# Altium PCB wsg1.0.PcbDoc (part 3 of 3)
Units mm, origin at the board's own origin, x right, y up, seen from the top; angles counter-clockwise.
Board outline 55.37 x 28.61 mm, 4 copper layers (F.Cu, In1.Cu, In2.Cu, B.Cu); 38 components, 55 nets, 181 pads, 63 vias.
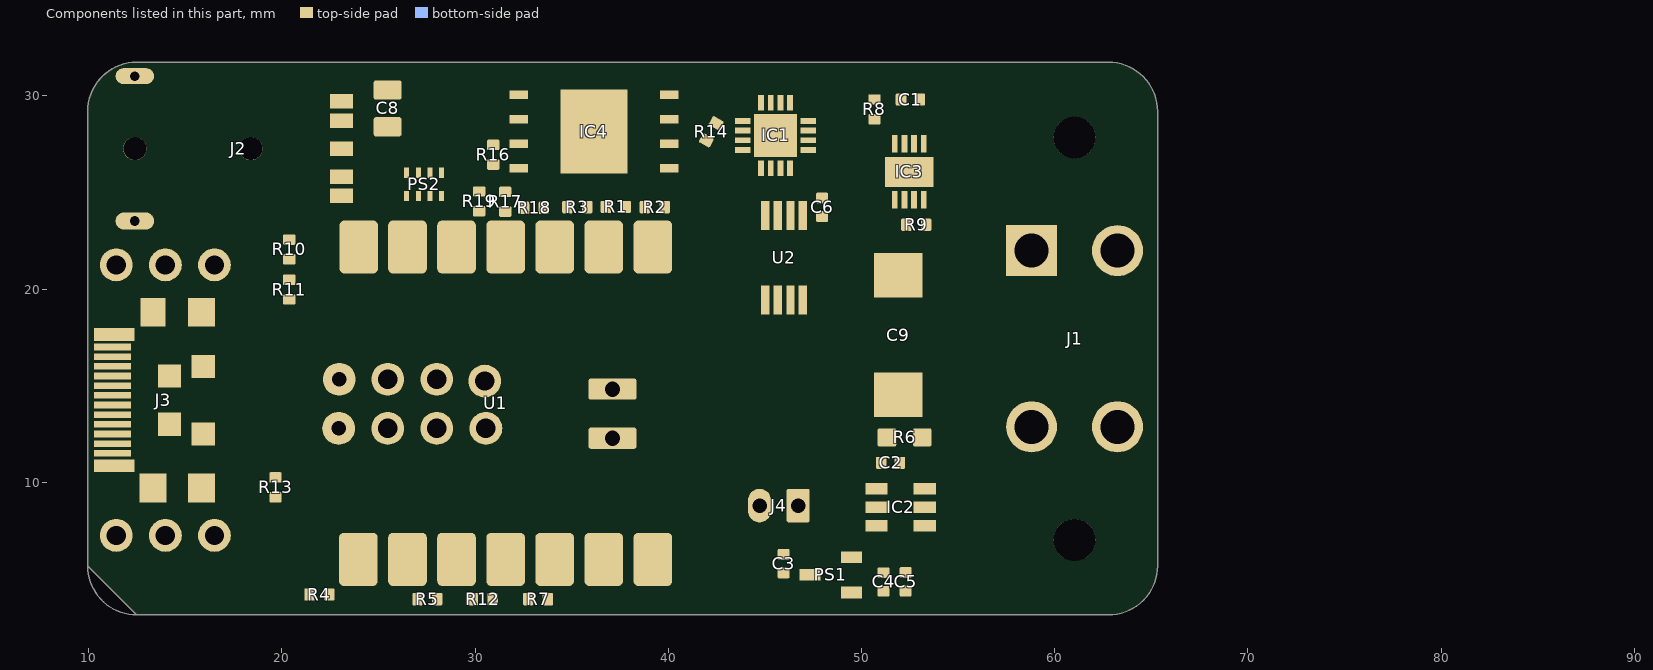
[diagram p5: the components of this part, seen from the top]

## Polygon pours and split planes (outlines as drawn) (continued)
GNDA on F.Cu "F.Cu-GNDA-19" (solid, remove dead copper, pour order 30255): 50.445,26.196 50.445,25.942 51.22,25.294 52.471,26.069 51.22,26.844
Net-(PS2-FB) on F.Cu "F.Cu-Net-(PS2-FB)-3" (solid, remove dead copper, pour order 30341): 21.234,21.603 21.234,21.476 21.881,21.632 21.751,21.949 21.433,22.08
GNDA on F.Cu "F.Cu-GNDA-18" (solid, remove dead copper, pour order 30271): 26.064,20.895 25.556,20.895 25.467,20.209 25.81,20.208 26.153,20.209
CS-MEM on F.Cu "F.Cu-CS-MEM-4" (solid, remove dead copper, pour order 30389): 29.35,4.013 29.35,3.886 29.653,3.679 29.891,3.949 29.653,4.219
"DAC Bias" on F.Cu "F.Cu-DAC Bias" (solid, remove dead copper, pour order 30326): 52.627,28.053 52.754,28.053 53.007,28.608 52.69,28.74 52.373,28.608
5V5 on F.Cu "F.Cu-5V5-10" (solid, remove dead copper, pour order 30272): 49.856,10.445 49.856,10.953 49.17,11.042 49.169,10.699 49.17,10.356
CS-MEM on F.Cu "F.Cu-CS-MEM-3" (solid, remove dead copper, pour order 30392): 32.837,29.913 33.016,30.092 32.725,30.245 32.249,30.06 32.725,29.834
GNDA on F.Cu "F.Cu-GNDA-17" (solid, remove dead copper, pour order 30321): 47.833,25.047 48.087,25.047 48.461,25.262 48.33,25.58 48.013,25.71
CS-MEM on F.Cu "F.Cu-CS-MEM-2" (solid, remove dead copper, pour order 30337): 29.488,3.886 29.488,4.013 28.951,4.356 28.819,4.039 28.951,3.722
GNDA on F.Cu "F.Cu-GNDA-16" (solid, remove dead copper, pour order 30249): 25.556,20.209 26.064,20.209 27.083,20.816 26.5,22.175 25.5,21.299
5V5 on F.Cu "F.Cu-5V5-9" (solid, remove dead copper, pour order 30300): 45.673,30.163 45.927,30.163 46.117,30.718 45.8,30.85 45.483,30.718
MISO on F.Cu "F.Cu-MISO" (solid, remove dead copper, pour order 30334): 33.928,25.141 34.018,25.231 33.807,25.804 33.489,25.673 33.359,25.356
"5V Reference" on F.Cu "F.Cu-5V Reference-2" (solid, remove dead copper, pour order 30348): 48.55,23.622 48.55,23.876 48.184,24.018 47.959,23.749 48.184,23.48
GNDA on F.Cu "F.Cu-GNDA-15" (solid, remove dead copper, pour order 30207): 26.83,26.359 27.88,26.379 27.91,24.379 27.47,22.839 26.85,23.559
"5V Reference" on F.Cu "F.Cu-5V Reference-1" (solid, remove dead copper, pour order 30267): 51.571,13.269 51.063,13.269 50.848,12.648 51.317,12.318 51.787,12.648
Net-(J3-CC) on F.Cu "F.Cu-Net-(J3-CC)" (solid, remove dead copper, pour order 30365): 19.797,10.789 19.543,10.789 19.4,10.487 19.67,10.248 19.94,10.487
MISO_ADC on F.Cu "F.Cu-MISO_ADC" (solid, remove dead copper, pour order 30359): 43.066,28.636 43.066,28.763 42.522,28.866 42.474,28.581 42.713,28.353
5V5 on F.Cu "F.Cu-5V5-8" (solid, remove dead copper, pour order 30277): 49.916,7.335 49.916,7.843 49.23,7.932 49.229,7.589 49.23,7.246
CS-DAC on F.Cu "F.Cu-CS-DAC-2" (solid, remove dead copper, pour order 30335): 46.384,22.983 46.257,22.983 46.013,22.43 46.33,22.298 46.647,22.43
5V5 on F.Cu "F.Cu-5V5-7" (solid, remove dead copper, pour order 30308): 51.45,27.392 51.45,27.646 50.901,27.806 50.769,27.489 50.901,27.172
GNDA on F.Cu "F.Cu-GNDA-14" (solid, remove dead copper, pour order 30319): 47.738,27.826 47.738,27.572 48.078,27.207 48.321,27.449 48.32,27.792
CS-DAC on F.Cu "F.Cu-CS-DAC-1" (solid, remove dead copper, pour order 30377): 21.494,4.779 21.367,4.779 21.17,4.426 21.43,4.188 21.69,4.426
CS-MEM on F.Cu "F.Cu-CS-MEM-1" (solid, remove dead copper, pour order 30382): 28.58,3.976 28.58,4.103 28.232,4.255 28.039,3.949 28.301,3.719
MOSI_ADC on F.Cu "F.Cu-MOSI_ADC" (solid, remove dead copper, pour order 30420): 43.262,28.228 43.352,28.138 43.45,28.049 43.851,28.2 43.45,28.337
5V5 on F.Cu "F.Cu-5V5-6" (solid, remove dead copper, pour order 30425): 51.42,27.646 51.42,27.392 51.57,27.369 51.721,27.519 51.57,27.669
GNDA on F.Cu "F.Cu-GNDA-13" (solid, remove dead copper, pour order 30411): 46.173,25.699 46.427,25.699 46.45,25.849 46.3,26.25 46.15,25.849
GNDA on F.Cu "F.Cu-GNDA-12" (solid, remove dead copper, pour order 30274): 27.504,20.895 26.996,20.895 26.907,20.209 27.25,20.208 27.593,20.209
BAT+ on F.Cu "F.Cu-BAT+" (solid, remove dead copper, pour order 30262): 38.666,14.484 39.025,14.843 38.298,15.266 37.111,14.823 38.192,14.294
Net-(IC2-OUT) on F.Cu "F.Cu-Net-(IC2-OUT)-1" (solid, remove dead copper, pour order 30288): 54.268,7.715 53.909,8.075 53.249,8.059 53.269,7.758 53.845,7.55
Net-(PS2-FB) on F.Cu "F.Cu-Net-(PS2-FB)-2" (solid, remove dead copper, pour order 30371): 20.97,21.476 20.97,21.603 20.617,21.799 20.379,21.539 20.617,21.279
SCLK_DAC on F.Cu "F.Cu-SCLK_DAC" (solid, remove dead copper, pour order 30360): 45.552,22.909 45.642,22.819 45.826,23.054 45.661,23.804 45.444,23.054
GNDA on F.Cu "F.Cu-GNDA-11" (solid, remove dead copper, pour order 30301): 45.927,25.755 45.673,25.755 45.483,25.2 45.8,25.068 46.117,25.2
Net-(U1-PA4_A1_D1) on F.Cu "F.Cu-Net-(U1-PA4_A1_D1)" (solid, remove dead copper, pour order 30254): 26.956,3.949 27.083,3.949 27.462,4.943 26.5,6.01 25.809,4.672
GNDA on F.Cu "F.Cu-GNDA-10" (solid, remove dead copper, pour order 30309): 53.622,27.646 53.622,27.392 54.169,27.242 54.301,27.559 54.169,27.876
AmplifiedSig on F.Cu "F.Cu-AmplifiedSig" (solid, remove dead copper, pour order 30353): 51.26,28.662 51.26,28.916 50.907,29.049 50.669,28.789 50.907,28.529
3V3 on F.Cu "F.Cu-3V3-4" (solid, remove dead copper, pour order 30303): 42.438,29.654 42.259,29.834 41.732,29.576 41.863,29.258 42.18,29.128
S- on F.Cu "F.Cu-S-" (solid, remove dead copper, pour order 30401): 51.463,24.019 51.717,24.019 51.776,24.169 51.72,24.62 51.57,24.636
Net-(PS2-FB) on F.Cu "F.Cu-Net-(PS2-FB)-1" (solid, remove dead copper, pour order 30388): 20.443,21.019 20.316,21.019 20.11,20.717 20.38,20.478 20.65,20.717
GNDA on F.Cu "F.Cu-GNDA-9" (solid, remove dead copper, pour order 30369): 45.38,6.333 45.38,6.206 45.746,6 45.971,6.269 45.746,6.538
Net-(IC3-RG_2) on F.Cu "F.Cu-Net-(IC3-RG_2)" (solid, remove dead copper, pour order 30342): 53.016,23.895 52.836,23.716 53.07,23.228 53.341,23.328 53.42,23.649
Net-(IC2-OUT) on F.Cu "F.Cu-Net-(IC2-OUT)" (solid, remove dead copper, pour order 30265): 53.709,11.393 54.068,11.752 53.63,12.503 53.142,12.32 52.946,11.844
3V3 on F.Cu "F.Cu-3V3-3" (solid, remove dead copper, pour order 30223): 29.396,19.821 29.904,19.821 30.04,21.299 29.04,22.175 28.354,20.836
"5V USB" on F.Cu "F.Cu-5V USB" (solid, remove dead copper, pour order 30391): 23.573,29.592 23.573,29.846 23.187,29.954 23.089,29.719 23.187,29.484
USB_D- on F.Cu "F.Cu-USB_D-" (solid, remove dead copper, pour order 30282): 22.115,24.895 22.115,24.743 22.49,24.444 23.091,24.819 22.49,25.194
5V5 on F.Cu "F.Cu-5V5-5" (solid, remove dead copper, pour order 30268): 49.895,7.843 49.895,7.335 50.8,7.459 50.771,7.759 50.195,7.953
CS-MEM on F.Cu "F.Cu-CS-MEM" (solid, remove dead copper, pour order 30327): 28.134,4.103 28.134,3.976 28.689,3.722 28.821,4.039 28.689,4.356
"5V Reference" on F.Cu "F.Cu-5V Reference" (solid, remove dead copper, pour order 30381): 48.921,28.278 48.741,28.099 48.955,27.732 49.191,27.828 49.287,28.064
Net-(PS2-FB) on F.Cu "F.Cu-Net-(PS2-FB)" (solid, remove dead copper, pour order 30324): 26.196,24.536 26.196,24.663 25.641,24.916 25.509,24.599 25.641,24.282
3V3 on F.Cu "F.Cu-3V3-2" (solid, remove dead copper, pour order 30399): 39.576,29.765 39.756,29.585 40.143,29.834 40.051,30.06 39.575,29.834
SCLK_FLASH on F.Cu "F.Cu-SCLK_FLASH" (solid, remove dead copper, pour order 30370): 34.844,24.829 34.717,24.829 34.52,24.476 34.78,24.238 35.04,24.476
CS-ADC on F.Cu "F.Cu-CS-ADC" (solid, remove dead copper, pour order 30427): 43.967,26.912 44.094,26.912 44.121,27.049 43.85,27.2 43.767,27.049
SCLK_ADC on F.Cu "F.Cu-SCLK_ADC" (solid, remove dead copper, pour order 30393): 36.886,24.765 36.796,24.855 36.54,24.53 36.769,24.248 37.03,24.486
GNDA on F.Cu "F.Cu-GNDA-8" (solid, remove dead copper, pour order 30426): 53.52,27.392 53.52,27.646 53.37,27.669 53.219,27.519 53.37,27.369
SCLK on F.Cu "F.Cu-SCLK-3" (solid, remove dead copper, pour order 30221): 38.391,23.816 38.301,23.905 36.621,23.549 36.659,22.173 37.66,21.76
GNDA on F.Cu "F.Cu-GNDA-7" (solid, remove dead copper, pour order 30364): 19.543,8.689 19.797,8.689 19.94,8.992 19.67,9.23 19.4,8.992
MOSI on F.Cu "F.Cu-MOSI" (solid, remove dead copper, pour order 30231): 30.274,23.992 30.147,23.992 30.58,21.839 31.58,22.173 31.795,23.549
"ADC DReady" on F.Cu "F.Cu-ADC DReady-1" (solid, remove dead copper, pour order 30338): 28.977,8.65 29.104,8.65 29.621,8.832 29.49,9.15 29.173,9.28
GNDA on F.Cu "F.Cu-GNDA-6" (solid, remove dead copper, pour order 30295): 52.552,9.405 52.552,9.913 52.357,10.21 52.039,10.079 51.909,9.762
SCLK on F.Cu "F.Cu-SCLK-2" (solid, remove dead copper, pour order 30376): 35.736,23.649 35.863,23.649 36.06,24.002 35.8,24.24 35.54,24.002
CS-DAC on F.Cu "F.Cu-CS-DAC" (solid, remove dead copper, pour order 30344): 46.257,22.838 46.384,22.838 46.536,23.054 46.32,23.805 46.104,23.054
5V5 on F.Cu "F.Cu-5V5-4" (solid, remove dead copper, pour order 30264): 26.006,27.525 26.514,27.525 26.195,28.343 25.47,28.4 25.249,27.899
3V3 on F.Cu "F.Cu-3V3-1" (solid, remove dead copper, pour order 30417): 45.427,30.199 45.173,30.199 45.15,30.049 45.3,29.648 45.45,30.049
5V5 on F.Cu "F.Cu-5V5-3" (solid, remove dead copper, pour order 30345): 50.794,10.374 50.435,10.015 50.371,9.959 50.771,9.658 50.996,9.959
SCLK on F.Cu "F.Cu-SCLK-1" (solid, remove dead copper, pour order 30375): 37.727,23.659 37.854,23.659 38.05,24.012 37.79,24.25 37.53,24.012
GNDA on F.Cu "F.Cu-GNDA-5" (solid, remove dead copper, pour order 30278): 26.794,19.825 26.286,19.825 26.197,19.139 26.54,19.138 26.883,19.139
GNDA on F.Cu "F.Cu-GNDA-4" (solid, remove dead copper, pour order 30318): 45.427,25.751 45.173,25.751 44.808,25.412 45.05,25.168 45.393,25.169
GNDA on F.Cu "F.Cu-GNDA-3" (solid, remove dead copper, pour order 30416): 47.8,27.572 47.8,27.826 47.65,27.849 47.249,27.699 47.65,27.549
3V3 on F.Cu "F.Cu-3V3" (solid, remove dead copper, pour order 30279): 29.904,19.745 29.396,19.745 29.307,19.059 29.65,19.058 29.993,19.059
"ADC DReady" on F.Cu "F.Cu-ADC DReady" (solid, remove dead copper, pour order 30428): 44.5,29.713 44.5,29.586 44.65,29.499 44.801,29.649 44.65,29.799
5V5 on F.Cu "F.Cu-5V5-2" (solid, remove dead copper, pour order 30289): 26.245,27.984 25.885,27.625 25.917,27.199 26.261,27.198 26.577,27.33
GNDA on F.Cu "F.Cu-GNDA-2" (solid, remove dead copper, pour order 30413): 45.673,25.699 45.927,25.699 45.95,25.849 45.8,26.25 45.65,25.849
GNDA on F.Cu "F.Cu-GNDA-1" (solid, remove dead copper, pour order 30310): 22.061,28.44 21.881,28.62 21.409,28.326 21.539,28.008 21.857,27.878
SCLK on F.Cu "F.Cu-SCLK" (solid, remove dead copper, pour order 30358): 38.287,23.891 38.377,23.802 38.832,23.919 38.791,24.24 38.52,24.363
Net-(IC3-RG_1) on F.Cu "F.Cu-Net-(IC3-RG_1)" (solid, remove dead copper, pour order 30356): 52.347,23.919 52.093,23.919 52.05,23.514 52.32,23.328 52.546,23.613
GNDA on F.Cu "F.Cu-GNDA" (solid, remove dead copper, pour order 30292): 50.32,4.04 50.32,4.548 50.015,4.599 49.469,4.294 50.015,3.989
BAT- on F.Cu "F.Cu-BAT-" (solid, remove dead copper, pour order 30260): 45.516,7.944 45.875,7.585 46.694,7.914 46.721,8.79 46.12,9.038
5V5 on F.Cu "F.Cu-5V5-1" (solid, remove dead copper, pour order 30412): 45.927,30.199 45.673,30.199 45.65,30.049 45.8,29.648 45.95,30.049
5V5 on F.Cu "F.Cu-5V5" (solid, remove dead copper, pour order 30339): 45.787,20.4 45.533,20.4 45.444,20.184 45.66,19.434 45.876,20.184
GNDA on In1.Cu "In1.Cu-GNDA-4" (solid, remove dead copper, pour order 30205): 44.67,24.799 47.37,24.749 47.38,18.489 44.5,18.499
GNDA on In1.Cu "In1.Cu-GNDA-3" (solid, remove dead copper, pour order 30201): 48.15,7.509 52.19,7.609 52.39,10.569 46.13,10.649 46.08,20.389 46.51,20.379 46.54,24.539 45.68,24.429 45.62,33.919 0,34.079 0.15,2.519 48.19,2.569
GNDA on In1.Cu "In1.Cu-GNDA-2" (solid, remove dead copper, pour order 30430): 66.619,12.02 66.69,1.349 48.86,1.669 48.78,7.119 52.51,7.109 52.56,11.009 46.329,11.08 46.189,20.11 46.789,20.12 46.739,24.52 46.099,24.57 46.009,33.16 66.499,33.67
GNDA on In1.Cu "In1.Cu-GNDA-1" (solid, remove dead copper, pour order 30206): 49.53,11.519 54.54,11.579 54.53,6.629 49.58,6.749
GNDA on In1.Cu "In1.Cu-GNDA" (solid, remove dead copper, pour order 30204): 47.93,30.339 47.93,24.449 43.14,24.529 43.17,30.249
"2V5 Ref" on In2.Cu "In2.Cu-2V5 Ref" (solid, remove dead copper, pour order 30200): 60.39,28.809 46.65,28.229 46.66,32.869 65.85,33.159 66.71,10.249 60.47,10.289
5V5 on In2.Cu "In2.Cu-5V5" (solid, remove dead copper, pour order 30202): 46.28,33.009 3.32,32.959 3.24,0.129 20,0 20.12,21.559 20.13,26.089 29.89,26.159 29.89,28.569 38.14,28.529 38.18,30.029 43.53,30.139 43.77,2.409 54.64,2.129 54.44,27.899 46.28,27.849
3V3 on In2.Cu "In2.Cu-3V3" (solid, remove dead copper, pour order 30203): 21.63,21.069 24.9,21.049 24.92,25.419 30.59,25.469 30.62,28.119 38.57,28.119 38.59,29.569 42.24,29.649 42.35,0.089 21.66,0.029
CS-MEM on B.Cu "B.Cu-CS-MEM-1" (solid, remove dead copper, pour order 30240): 32.733,29.272 32.823,29.183 33.34,29.246 33.341,29.59 33.023,29.72
"DAC Bias" on B.Cu "B.Cu-DAC Bias-4" (solid, remove dead copper, pour order 30252): 48.827,26.286 48.737,26.376 48.553,26.269 48.601,26.151 48.719,26.103
CS-ADC on B.Cu "B.Cu-CS-ADC-1" (solid, remove dead copper, pour order 30220): 43.967,25.523 44.094,25.523 44.347,26.078 44.03,26.21 43.713,26.078
Net-(J3-CC) on B.Cu "B.Cu-Net-(J3-CC)-1" (solid, remove dead copper, pour order 30208): 17.493,20.009 17.747,20.009 17.295,21.574 16.51,21.25 16.185,20.464
MOSI_ADC on B.Cu "B.Cu-MOSI_ADC-1" (solid, remove dead copper, pour order 30234): 40.821,25.593 40.821,25.466 41.367,25.169 41.499,25.486 41.367,25.803
"DAC Bias" on B.Cu "B.Cu-DAC Bias-3" (solid, remove dead copper, pour order 30210): 48.116,26.142 48.116,26.396 47.561,26.586 47.429,26.269 47.561,25.952
"ADC DReady" on B.Cu "B.Cu-ADC DReady-1" (solid, remove dead copper, pour order 30228): 43.58,29.059 43.67,28.969 44.241,29.182 44.111,29.5 43.793,29.63
CS-DAC on B.Cu "B.Cu-CS-DAC-1" (solid, remove dead copper, pour order 30216): 45.644,22.363 45.644,22.236 46.199,21.982 46.331,22.299 46.199,22.616
SCLK_ADC on B.Cu "B.Cu-SCLK_ADC-1" (solid, remove dead copper, pour order 30236): 42.015,25.016 42.015,24.889 42.554,24.717 42.686,25.034 42.554,25.351
CS-DAC on B.Cu "B.Cu-CS-DAC" (solid, remove dead copper, pour order 30230): 28.492,8.146 28.492,8.273 27.941,8.506 27.809,8.189 27.941,7.872
Net-(PS2-FB) on B.Cu "B.Cu-Net-(PS2-FB)-1" (solid, remove dead copper, pour order 30242): 21.905,22.544 21.815,22.634 21.508,22.192 21.749,21.948 22.067,22.08
"DAC Bias" on B.Cu "B.Cu-DAC Bias-2" (solid, remove dead copper, pour order 30250): 48.827,26.286 48.737,26.376 48.553,26.269 48.601,26.151 48.719,26.103
Net-(J3-CC) on B.Cu "B.Cu-Net-(J3-CC)" (solid, remove dead copper, pour order 30212): 19.807,11.895 19.553,11.895 19.363,11.34 19.68,11.208 19.997,11.34
CS-MEM on B.Cu "B.Cu-CS-MEM" (solid, remove dead copper, pour order 30244): 28.239,4.23 28.15,4.14 28.578,3.797 28.821,4.038 28.689,4.356
"ADC DReady" on B.Cu "B.Cu-ADC DReady" (solid, remove dead copper, pour order 30238): 29.791,9.687 29.701,9.777 29.248,9.392 29.489,9.148 29.833,9.149
MOSI_ADC on B.Cu "B.Cu-MOSI_ADC" (solid, remove dead copper, pour order 30226): 31.433,24.965 31.343,25.055 30.772,24.842 30.902,24.524 31.22,24.394
CS-ADC on B.Cu "B.Cu-CS-ADC" (solid, remove dead copper, pour order 30222): 34.154,10.775 34.027,10.775 33.773,10.22 34.09,10.088 34.407,10.22
Net-(PS2-FB) on B.Cu "B.Cu-Net-(PS2-FB)" (solid, remove dead copper, pour order 30224): 24.98,24.159 25.07,24.069 25.641,24.282 25.511,24.6 25.193,24.73
"DAC Bias" on B.Cu "B.Cu-DAC Bias-1" (solid, remove dead copper, pour order 30218): 52.004,28.803 52.004,28.676 52.559,28.422 52.691,28.739 52.559,29.056
"DAC Bias" on B.Cu "B.Cu-DAC Bias" (solid, remove dead copper, pour order 30214): 48.685,19.994 48.505,20.174 47.979,19.916 48.109,19.598 48.427,19.468
SCLK_ADC on B.Cu "B.Cu-SCLK_ADC" (solid, remove dead copper, pour order 30232): 37.987,24.889 37.987,25.016 37.441,25.313 37.309,24.996 37.441,24.679
MISO on B.Cu "B.Cu-MISO-1" (solid, remove dead copper, pour order 30248): 41.651,26.24 41.741,26.15 42.077,26.571 41.835,26.814 41.517,26.682
MISO on B.Cu "B.Cu-MISO" (solid, remove dead copper, pour order 30246): 34.156,25.785 34.066,25.875 33.621,25.989 33.489,25.672 33.732,25.43

## Keep-outs
Edge.Cuts:
  circle w0.254: c19.181,5.291 r1.13
  circle w0.254: c28.46,29.58 r1.13
  circle w0: c28.46,29.58 r1.13
  lines w0: 9.95,5.672 ccw(c12.49,5.672) 12.49,3.132 ; 9.95,5.672 ccw(c12.49,5.672) 12.49,3.132 ; 9.95,5.672 12.49,3.132 ; 9.95,5.672 9.95,29.199 cw(c12.49,29.199) 12.49,31.739 62.782,31.739 cw(c62.782,29.199) 65.322,29.199 65.322,5.672 cw(c62.782,5.672) 62.782,3.132 12.49,3.132
  lines w0.254: 9.95,5.672 ccw(c12.49,5.672) 12.49,3.132 ; 9.95,5.672 ccw(c12.49,5.672) 12.49,3.132 ; 9.95,5.672 9.95,29.199 cw(c12.49,29.199) 12.49,31.739 62.782,31.739 cw(c62.782,29.199) 65.322,29.199 65.322,5.672 cw(c62.782,5.672) 62.782,3.132 12.49,3.132

## Silkscreen, mask and mechanical layers (free items; w line width, h text height)
F.SilkS:
  text "BJR@JHU / WSG 2.0" at 11.02,3.077 h0.81
B.SilkS:
  lines w0.254: 21.55,18.259 46.55,18.259 46.55,28.259 21.55,28.259 21.55,18.259 ; 21.61,3.669 35.54,3.669 35.54,10.129 21.61,10.129 21.61,3.669
  text "BJR@JHU / WSG 2.0" at 19.03,28.157 h0.81
  text "MAC:" at 54.11,21.89 h2
  text "Bat+" at 40.839,16.619 h0.81 r90
  text "Mahmoud Radwan / Weston Fortney / Aaren" at 63.64,14.871 h0.81
  text "Bat-" at 40.989,13.179 h0.81 r90
  text "P/N:" at 43.36,5.527 h2
F.Mask:
  circle w0.254: c19.181,5.291 r1.8
  circle w0.254: c28.46,29.58 r1.8
  region: 19.534,7.065 19.873,6.962 20.186,6.795 20.46,6.57 20.685,6.296 20.852,5.983 20.955,5.644 20.99,5.291 20.955,4.938 20.852,4.599 20.685,4.286 20.46,4.012 20.186,3.787 19.873,3.62 19.534,3.517 19.181,3.483 18.828,3.517 18.489,3.62 18.176,3.787 17.902,4.012 17.677,4.286 17.51,4.599 17.407,4.938 17.373,5.291 17.407,5.644 17.51,5.983 17.677,6.296 17.902,6.57 18.176,6.795 18.489,6.962 18.828,7.065 19.181,7.1
  region: 28.813,31.354 29.152,31.251 29.465,31.084 29.739,30.859 29.964,30.585 30.131,30.272 30.234,29.933 30.269,29.58 30.234,29.227 30.131,28.888 29.964,28.575 29.739,28.301 29.465,28.076 29.152,27.909 28.813,27.806 28.46,27.771 28.107,27.806 27.768,27.909 27.455,28.076 27.181,28.301 26.956,28.575 26.789,28.888 26.686,29.227 26.652,29.58 26.686,29.933 26.789,30.272 26.956,30.585 27.181,30.859 27.455,31.084 27.768,31.251 28.107,31.354 28.46,31.389
B.Mask:
  circle w0.254: c28.46,29.58 r1.8
  circle w0.254: c19.181,5.291 r1.8
  region: 28.813,31.354 29.152,31.251 29.465,31.084 29.739,30.859 29.964,30.585 30.131,30.272 30.234,29.933 30.269,29.58 30.234,29.227 30.131,28.888 29.964,28.575 29.739,28.301 29.465,28.076 29.152,27.909 28.813,27.806 28.46,27.771 28.107,27.806 27.768,27.909 27.455,28.076 27.181,28.301 26.956,28.575 26.789,28.888 26.686,29.227 26.652,29.58 26.686,29.933 26.789,30.272 26.956,30.585 27.181,30.859 27.455,31.084 27.768,31.251 28.107,31.354 28.46,31.389
  region: 19.534,7.065 19.873,6.962 20.186,6.795 20.46,6.57 20.685,6.296 20.852,5.983 20.955,5.644 20.99,5.291 20.955,4.938 20.852,4.599 20.685,4.286 20.46,4.012 20.186,3.787 19.873,3.62 19.534,3.517 19.181,3.483 18.828,3.517 18.489,3.62 18.176,3.787 17.902,4.012 17.677,4.286 17.51,4.599 17.407,4.938 17.373,5.291 17.407,5.644 17.51,5.983 17.677,6.296 17.902,6.57 18.176,6.795 18.489,6.962 18.828,7.065 19.181,7.1
F.Fab:
  drawing of 160 lines, arcs and shapes, not listed